# Altium PCB PCB1.PcbDoc (part 2 of 2)
Units mil, origin at the board's own origin, x right, y up, seen from the top; angles counter-clockwise.
Board outline 1771.65 x 629.92 mil, 4 copper layers (L1, L2, L3, L4), stack 61.583 mil thick; 35 components, 23 nets, 151 pads, 78 vias.
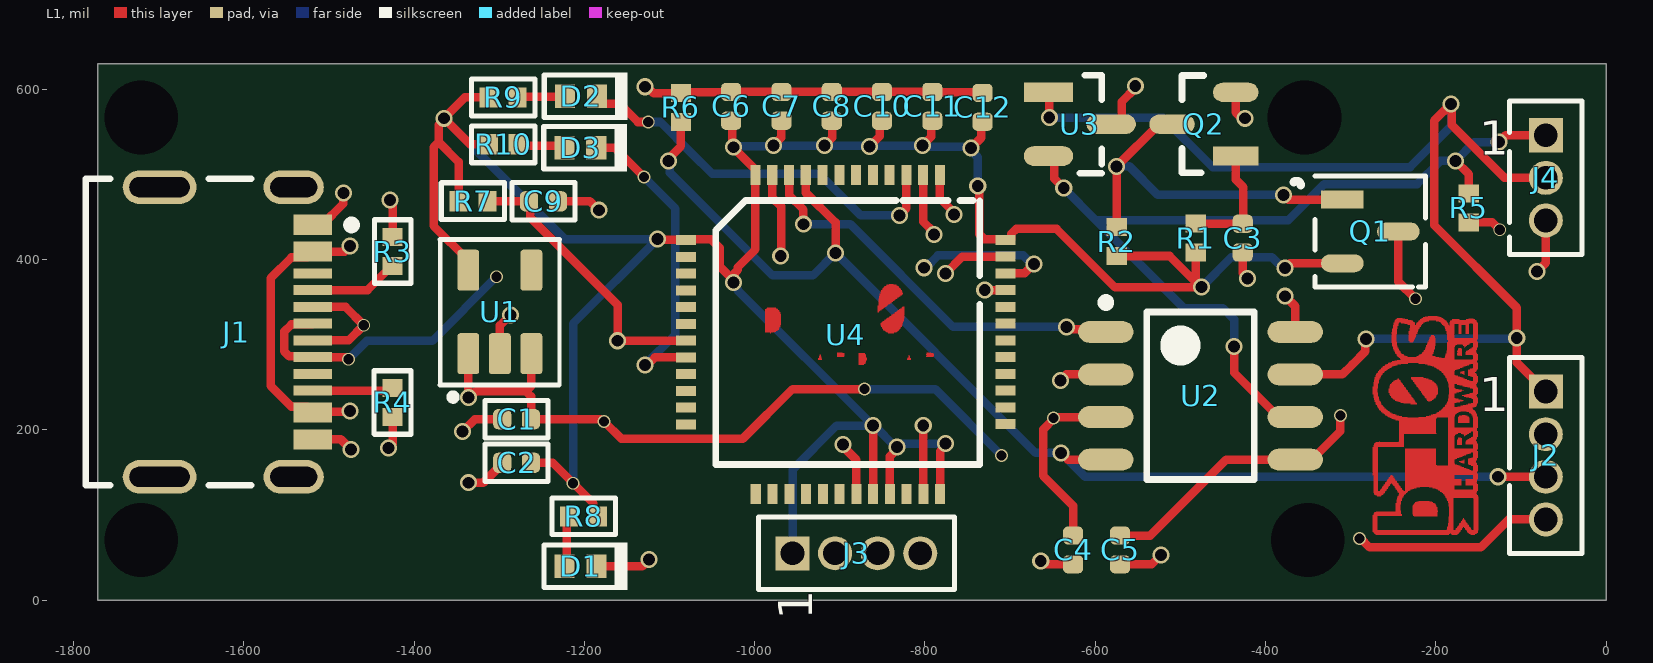
[diagram p0: L1 view]

## Part data (continued)
U4: "Microcontroller", Manufacturer=STMicroelectronics, Supplier Part Number=STM32G431C8T6-ND, Category=Microcontrollers, ComponentLink1Description=https://datasheet.ciiva.com:443/pdfs/VipMasterIC/IC/SGST/SGST-S-A0010030739/SGST-S-A0010102973-1.pdf?src-supplier=IHS+Markit, ComponentLink1URL=https://datasheet.ciiva.com:443/pdfs/VipMasterIC/IC/SGST/SGST-S-A0010030739/SGST-S-A0010102973-1.pdf?src-supplier=IHS+Markit, Manufacturer Part Number=STM32G431C8T6, Pricing="1=5.6, 10=3.797, 25=3.3284, 80=2.876, 230=2.57017, 440=2.48386 (USD)", RoHS=Yes, Stock=1745, Supplier=Digikey

## Free pads (board coordinates)
  round 60 hole 86.61: 13(-1720.47,70.87) 14(-1720.47,566.93) 15(-354.33,566.93) 16(-350.39,70.87)

## Via types
v1: diameter 20, hole 14, L1 to L4, 64 vias
v2: diameter 15, hole 12, L1 to L4, 14 vias

## Nets (pads, with @x,y where several pads share a name; then routed paths per layer and width w, separated by ;. In a path a pad name is that pad's centre, name@x,y a point inside that pad or via, vN(x,y) a via of type N, cw(c..) or ccw(c..) an arc to the next point about the centre after c; other vN are vias at no path point)
3.3V: C2.2 C6.2 C7.2 C8.2 C10.2 C11.2 C12.2 J2.4 J3.1 Q1.2 R1.2 R2.2 R7.2 R8.1 R9.1 R10.1 U1.5 U4.1 U4.20 U4.21 U4.24 U4.36 U4.48 | length 4018
  L1 w10: v1@-1371,558.65 -1371,538 ; R7.2 -1347.72,514.72 -1371,538 ; U1.5 -1336.22,398.82 -1377,439.6 -1377,532 -1371,538 ; R10.1 -1334.43,535.43 v1(-1365,566) -1340.45,590.55 R9.1 ; C2.2 -1262.43,161.25 -1236.97,161.25 -1189.41,113.69 -1189.41,104.06 R8.1 ; v1(-1114,424) -1113.49,423.49 U4.1@-1081.1,423.49 ; U4.1@-1081.1,424 -1051.23,424 -1041.06,413.83 -1041.06,391.76 -1025,375.71 v1(-1025,373) -1023.09,374.91 -1023.09,384.61 -1019.69,388 -1019.69,391.29 -999.01,411.97 -999.01,505.46 -1025,531.45 v1(-1025,532) -1026.28,533.28 -1026.28,561.79 C6.2 ; v1(-978,534) -968.7,543.3 -968.7,562.87 C7.2 ; v1(-918,534) -908.7,543.3 -908.7,562.32 C8.2 ; v1(-865,533) -852.84,545.16 -852.84,560.63 C10.2 ; U4.20 v1@-860.9,204.84 ; U4.21 -841.21,169.08 -833,177.29 v1(-833,180) ; v1(-803,534) -792.81,544.19 -792.81,562.44 C11.2@-792.18,563.07 ; U4.24 -782.16,175.14 -776,181.29 v1(-776,184) ; v1(-746,531) -733.87,543.13 -733.87,561.14 C12.2@-733.12,561.89 ; v1(-738,486.68) -736.09,484.77 -736.09,430.05 -730.23,424.2 U4.36@-705.58,424.2 ; U4.36 -699.68,423.29 -698.77,424.2 -698.77,430.1 -692.87,436 -645.41,436 -576.72,367.31 -475.69,367.31 v1(-475,368) v1@-481.94,374.94 ; R2.2 -512.64,404.25 -483.32,374.94 v1@-481.94,374.94 ; R1.2 v1@-481.94,374.94 ; v1(-377.09,390.09) -371.51,395.67 Q1.2 ; v2(-289.61,72.43) -288.25,72.43 -277.89,62.06 -147.21,62.06 -114.31,94.96 J2.4
  L2 w10: v1(-377.09,390.09) -374.73,390.09 -339,354.36 -339,214.64 -289.61,165.25 v2(-289.61,72.43)
  L4 w10: v1(-1365,566) -1223,424 v1(-1114,424) -1213.19,324.81 v2(-1213.19,137.47) ; v1(-1025,373) -1025,370.29 -1020,365.29 -1020,363.94 v1(-861.05,205) -859.53,205 -834.53,180 v1(-833,180) -830.29,180 -826.29,184 v1(-776,184) ; v1(-1025,532) -1024,533 -979,533 v1(-978,534) v1(-918,534) -917.5,533.5 -865.5,533.5 v1(-865,533) -864.5,533.5 -803.5,533.5 v1(-803,534) -801.5,532.5 -747.5,532.5 v1(-746,531) -746,528.29 -738,520.29 v1(-738,486.68) ; J3.1 -955.51,153.19 -903.7,205 v1@-861.87,205 ; v1(-475,368) -440,403 -392.71,403 -379.8,390.09 v1(-377.09,390.09)
3.3V-CAN: C5.2 Q1.3 U2.5 | length 588.9
  L1 w10: C5.2 -535.37,75.98 -446.2,165.16 U2.5 -345.47,165.16 -312,198.63 v2(-312,217) ; Q1.3 -244.09,374.09 v2(-224,354)
  L2 w10: v2(-312,217) -312,241.5 -224,329.5 v2(-224,354)
5V: C1.2 C4.2 J1.A4B9 J1.B4A9 U1.1 U1.3 U2.3 | length 1609.7
  L1 w10: v1(-1475,222) -1475.76,221.24 -1517.94,221.24 J1.B4A9 -1525.51,227.28 -1544.02,227.28 -1568.34,251.6 -1568.34,378.32 -1544.02,402.64 -1525.51,402.64 J1.A4B9 -1481.55,409.45 v1(-1475,416) ; U1.1 -1336.11,289.46 -1336.11,238.11 v1(-1336,238) -1334.65,238 -1327.24,245.41 -1268.66,245.41 ; U1.3 -1262.2,251.86 -1268.66,245.41 ; v2(-871,248) -955.42,248 -1013.88,189.54 -1156.53,189.54 v2(-1177,210) -1178.35,210 -1180.95,212.6 C1.2 -1262.6,239.35 -1268.66,245.41 ; C4.2 -625.98,110.91 -661,145.93 -661,200.65 -649,212.65 v2(-649,214) -647.84,215.16 U2.3
  L2 w10: v1(-1475,222) -1354.71,222 -1338.71,238 v1(-1336,238) ; v2(-710,170) -666.96,213.04 -655,213.04 -649.96,213.04 v2(-649,214)
  L4 w10: v2(-871,248) -788,248 v2(-710,170)
CAN_RX/BOOT0: J2.3 R6.1 U2.4 U4.45 | length 1426.6
  L1 w10: v1(-1101,516) -1101,518.71 -1094.71,525 -1086.61,533.09 R6.1 ; U4.45 -939.95,478.62 -904.97,443.64 v1(-904.97,407.97) ; v1(-640,173) -632.16,165.16 U2.4 ; v1(-127,145) J2.3
  L4 w10: v1(-1101,516) -1099.59,514.59 -1099.59,502.06 -978.9,381.37 -931.57,381.37 v1(-904.97,407.97) -670,173 v1(-640,173) -612,145 v1(-127,145)
CAN_TX: U2.1 U4.sS | length 472.5
  L1 w10: U4.sS -959.32,499.24 -959.32,475.37 -942.75,458.79 v1(-942.75,441.58) ; v1(-634,321) -631.14,318.14 -590.58,318.14 U2.1
  L4 w10: v1(-942.75,441.58) -887.58,441.58 -767,321 -655,321 v1(-634,321)
CANH: J2.1 J4.2 U2.7 U3.1 | length 1420.2
  L1 w10: U3.1 -654,595.53 v1(-654,567) ; U2.7 -309.84,265.16 -298.06,276.94 -282.68,292.32 -282.68,306.32 v1(-282,307) ; J2.1 -105,279.1 v1(-105,308) -105,343.55 -202,440.55 -202,563 v1(-182,583) -181.36,582.36 -181.36,558 -119.42,496.06 J4.2
  L4 w10: v1(-654,567) -653.5,566.5 -520.1,566.5 -462.22,508.62 -230.38,508.62 -224.52,514.48 -182,557 v1(-182,583) ; v1(-282,307) -165,307 -106,307 v1(-105,308)
CANL: J4.1 R5.1 U2.6 U3.2 | length 1079.9
  L1 w10: U3.2 -654.02,521.65 -648,515.63 -648,495 v1(-637,484) ; v1(-437,298) -437,267.31 -384.84,215.16 U2.6 ; v1(-177,516) -161.42,500.42 R5.1 ; v1(-126,538) -117.94,546.06 J4.1
  L4 w10: v1(-637,484) -599,446 ; v1(-437,298) -437,329.93 -450.07,343 -496,343 -599,446 ; v1(-126,538) -155,538 v1(-177,516) -194.72,516 -222.09,488.62 -331.02,488.62 -373.65,446 -599,446
GND: C1.1 C2.1 C3.1 C4.1 C5.1 C6.1 C7.1 C8.1 C9.1 C10.1 C11.1 C12.1 D1.1 J1.A1B12 J1.B1A12 J1.S1 J1.S2 J1.S3 J1.S4 J3.2 J4.3 Q2.2 R3.2 R4.2 R6.2 U1.2 U2.2 U2.8 U3.3 U4.19 U4.23 U4.35 U4.47 | length 1576.2
  L1 w10: J1.B1A12 -1485.98,188.98 v1(-1474,177) ; J1.A1B12 -1507.87,440.94 -1483,465.82 v1(-1483,478) ; v1(-1430,179) -1425.2,183.8 R4.2 ; v1(-1428,470) -1425.2,467.2 R3.2 ; v1(-1343,198) -1328.4,212.6 C1.1 ; v1(-1336,138) -1318.69,138 -1296.46,160.24 C2.1 ; U1.2@-1299.18,289.6 -1299.18,322.72 v1(-1286.8,335.11) ; C9.1 -1193.5,468.5 v1(-1183,458) ; D1.1 -1132.02,39.98 v1(-1124,48) ; v1(-1129,603) -1126.29,603 -1118.68,595.38 -1086.98,595.38 -1086.02,596.34 -1028.15,596.34 C6.1 C7.1 C8.1 C10.1 C11.1 -790.75,596.34 -732.87,596.34 C12.1 ; U4.47 -979.32,472.74 -969,462.42 -969,404.74 v1(-969.37,404.37) ; v1(-896,183) -896,180.29 -880.58,164.88 U4.19 ; v1(-802,205) -801.84,204.84 U4.23 ; v1(-776,383.86) -756.26,403.61 U4.35 ; v1(-664,46) -660.13,42.13 C4.1 ; v1(-641,258) -633.84,265.16 U2.2 ; U3.3 -574.74,559.06 -568.72,565.07 -568.72,585.57 -553,601.29 v1(-553,604) ; C5.1 -533.87,42.13 v1(-523,53) ; Q2.2 -435.02,572.86 -429.16,567 -425,567 v1(-424,566) ; C3.1 -426.82,383.82 v1(-421,378) ; v1(-377,357) -365.16,345.16 U2.8 ; v1(-81,386) -70.87,396.13 J4.3
NetC3_2: C3.2 Q2.1 R1.1 | length 138.8
  L1 w10: R1.1 -481.9,442.17 -426.86,442.17 C3.2 -426,442.94 -426,485 -435.02,494.02 Q2.1
NetC9_2: C9.2 R7.1 U4.7 | length 335.9
  L1 w10: R7.1 C9.2 -1263.56,467.1 -1263.56,449.56 -1161.03,347.03 v1(-1161.03,304.71) ; v1@-1160.88,304.87 U4.7
NetD1_2: D1.2 R8.2 | length 60.7
  L1 w10: D1.2 -1220.53,42.71 -1220.53,95.69 R8.2
NetD2_2: D2.2 R9.2 | length 56
  L1 w10: R9.2 -1277.66,591.16 -1223.34,591.16 D2.2
NetD3_2: D3.2 R10.2 | length 56.5
  L1 w10: R10.2 -1276.3,533.46 -1225.39,533.46 D3.2
NetJ1_A5: J1.A5 R3.1 | length 105.2
  L1 w7: R3.1@-1426.38,392.44 R3.1
  L1 w10: J1.A5 -1454.65,364.17 R3.1@-1426.38,392.44
NetJ1_B5: J1.B5 R4.1 | length 94.8
  L1 w10: J1.B5 -1428.43,246.06 R4.1
NetJ2_2: J2.2 R5.2 | length 314
  L1 w10: R5.2 -133.62,443.62 v2(-125,435)
  L2 w10: v2(-125,435) -125,433.65 -130,428.65 -130,241.42 -89.28,200.7 -76.61,200.7 J2.2
NetQ1_1: Q1.1 Q2.3 R2.1 | length 437.9
  L1 w10: R2.1 v1(-574.8,509.57) -525.32,559.06 Q2.3 ; v1(-379,476) -373.47,470.47 Q1.1
  L4 w10: v1(-574.8,509.57) -560.17,509.57 -526.6,476 v1(-379,476)
STAT_LED: D2.1 U4.39 | length 465.3
  L1 w10: D2.1 -1185.33,589.79 -1178.52,582.98 -1158.52,582.98 -1137.15,561.61 v2(-1125,561.61) ; v1(-830,452) -821.84,460.16 U4.39
  L4 w10: v2(-1125,561.61) -1110.61,561.61 -1074,525 -1050,501 -924.37,501 -875.37,452 v1(-830,452)
SWCLK: J3.4 U4.38 | length 499
  L1 w10: U4.38 -802.16,444.69 -789.57,432.11 v1(-789.57,429.4)
  L2 w10: J3.4 -755,105.63 -755,106 -755,418.85 -764.57,428.43 -788.6,428.43 v1(-789.57,429.4)
SWDIO: J3.3 U4.37 | length 562.1
  L1 w10: U4.37 -782.47,471.88 -766,455.41 v1(-766,453)
  L2 w10: J3.3 -859.06,58.67 -859.06,81.06 -884,106 -920,142 -920,332.3 -798.3,454 -767,454 v1(-766,453)
USB_DN: J1.A7 J1.B7 U4.33 | length 1075
  L1 w10: J1.A7 -1476.88,305.12 v2(-1459,323) ; J1.B7 -1480.49,344.49 v2(-1459,323) ; v2@-1458.04,323.96 v2(-1459,323) ; v1(-729.76,364.24) U4.33
  L2 w10: v2(-1459,323) -1434.17,323 -1421,336.17 -1397.06,360.11 -1174.2,360.11 -1160.09,346 -937.24,346 -878.35,404.89 -878.35,433.35 -837.7,474 -757.3,474 -729.76,446.46 v1(-729.76,364.24)
USB_DP: J1.A6 J1.B6 U4.34 | length 1294.5
  L1 w10: J1.A6 -1519.61,323.9 -1544.02,323.9 -1552.34,315.58 -1552.34,292.2 -1546.48,286.34 -1519.61,286.34 J1.B6 -1480.79,285.43 -1478.35,283 v2(-1477,283) ; U4.34 -683.08,383.92 v1(-672,395)
  L2 w10: v2@-1303,380.11 -1079.94,380.11 -952.36,507.68 -729.3,507.68 -672,450.38 v1(-672,395)
  L4 w10: v2(-1477,283) -1455.5,304.5 -1378.5,304.5 v2(-1303,380) ; v1(-801.15,390.46) -799.11,390.46 -784.7,404.86 -684.57,404.86 -674.71,395 v1(-672,395)
WORD_LED: D3.1 U4.8 | length 373.8
  L1 w10: D3.1 -1164.5,531.5 v2(-1130,497) ; v1(-1129,276) -1126.29,276 -1117.11,285.18 U4.8
  L4 w10: v2(-1130,497) -1093,460 -1093,312 v1(-1129,276)
pads on no net: J1.A8 J1.B8 U1.4 U4.2 U4.3 U4.4 U4.5 U4.6 U4.9 U4.10 U4.11 U4.12 U4.13 U4.14 U4.15 U4.16 U4.17 U4.18 U4.22 U4.25 U4.26 U4.27 U4.28 U4.29 U4.30 U4.31 U4.32 U4.40 U4.41 U4.42 U4.43 U4.44

## Polygon pours and split planes (outlines as drawn)
GND on L3 (split plane): -20.1,20.1 -1751.56,20.1 -1751.56,609.82 -20.1,609.82

## Other copper
L1:
  region: 545 vertices and 13 holes, not listed, extent -274,77.06 -150.15,333.78
  region: -251.85,238.64 -252.67,238.64 -252.67,240.28 -253.49,240.28 -253.49,241.1 -254.31,241.1 -254.31,243.56 -255.13,243.56 -255.13,248.48 -254.31,248.48 -254.31,251.76 -253.49,251.76 -253.49,253.4 -252.67,253.4 -252.67,254.22 -251.85,254.22 -251.85,255.04 -251.03,255.04 -251.03,255.86 -250.21,255.86 -250.21,256.68 -249.39,256.68 -249.39,257.51 -247.75,257.51 -247.75,258.33 -246.11,258.33 -246.11,259.15 -244.47,259.15 -244.47,259.97 -243.65,259.97 -243.65,259.15 -242.83,259.15 -242.83,258.33 -242.01,258.33 -242.01,256.68 -241.19,256.68 -241.19,255.86 -240.37,255.86 -240.37,255.04 -239.55,255.04 -239.55,253.4 -238.73,253.4 -238.73,252.58 -237.91,252.58 -237.91,250.94 -237.09,250.94 -237.09,250.12 -236.27,250.12 -236.27,249.3 -235.45,249.3 -235.45,247.66 -234.63,247.66 -234.63,246.84 -233.81,246.84 -233.81,246.02 -232.99,246.02 -232.99,244.38 -232.17,244.38 -232.17,243.56 -231.35,243.56 -231.35,241.92 -230.53,241.92 -230.53,241.1 -229.71,241.1 -229.71,240.28 -228.89,240.28 -228.89,238.64 -228.07,238.64 -228.07,237.82 -227.25,237.82 -227.25,237 -226.43,237 -226.43,235.36 -225.61,235.36 -225.61,234.54 -224.79,234.54 -224.79,232.9 -223.97,232.9 -223.97,232.08 -223.15,232.08 -223.15,231.26 -222.33,231.26 -222.33,230.44 -229.71,230.44 -229.71,231.26 -237.91,231.26 -237.91,232.08 -241.19,232.08 -241.19,232.9 -243.65,232.9 -243.65,233.72 -246.11,233.72 -246.11,234.54 -247.75,234.54 -247.75,235.36 -248.57,235.36 -248.57,236.18 -250.21,236.18 -250.21,237 -251.03,237 -251.03,237.82 -251.85,237.82
  region: -168.19,160.72 -168.19,161.54 -170.65,161.54 -170.65,162.36 -172.29,162.36 -172.29,163.18 -169.83,163.18 -169.83,164 -167.37,164 -167.37,164.82 -166.55,164.82 -166.55,160.72 -167.37,160.72
  region: -228.07,259.97 -228.89,259.97 -228.89,261.61 -214.94,261.61 -214.94,260.79 -211.66,260.79 -211.66,259.97 -209.2,259.97 -209.2,259.15 -206.74,259.15 -206.74,258.33 -205.1,258.33 -205.1,257.51 -204.28,257.51 -204.28,256.68 -202.64,256.68 -202.64,255.86 -201.82,255.86 -201.82,255.04 -201,255.04 -201,254.22 -200.18,254.22 -200.18,253.4 -199.36,253.4 -199.36,251.76 -198.54,251.76 -198.54,249.3 -197.72,249.3 -197.72,242.74 -198.54,242.74 -198.54,241.1 -199.36,241.1 -199.36,239.46 -200.18,239.46 -200.18,238.64 -201,238.64 -201,237 -202.64,237 -202.64,236.18 -203.46,236.18 -203.46,235.36 -205.1,235.36 -205.1,234.54 -206.74,234.54 -206.74,233.72 -209.2,233.72 -209.2,234.54 -210.02,234.54 -210.02,235.36 -210.84,235.36 -210.84,237 -211.66,237 -211.66,237.82 -212.48,237.82 -212.48,238.64 -213.3,238.64 -213.3,240.28 -214.12,240.28 -214.12,241.1 -214.94,241.1 -214.94,241.92 -215.76,241.92 -215.76,243.56 -216.58,243.56 -216.58,244.38 -217.4,244.38 -217.4,246.02 -218.22,246.02 -218.22,246.84 -219.04,246.84 -219.04,247.66 -219.86,247.66 -219.86,249.3 -220.68,249.3 -220.68,250.12 -221.51,250.12 -221.51,250.94 -222.33,250.94 -222.33,252.58 -223.15,252.58 -223.15,253.4 -223.97,253.4 -223.97,254.22 -224.79,254.22 -224.79,255.86 -225.61,255.86 -225.61,256.68 -226.43,256.68 -226.43,258.33 -227.25,258.33 -227.25,259.15 -228.07,259.15
  region: -173.93,210.75 -173.93,214.85 -173.11,214.85 -173.11,215.67 -172.29,215.67 -172.29,216.49 -169.01,216.49 -169.01,217.32 -165.73,217.32 -165.73,216.49 -163.27,216.49 -163.27,215.67 -161.63,215.67 -161.63,214.03 -160.81,214.03 -160.81,208.29 -173.93,208.29 -173.93,209.93
  region: -174.75,186.97 -174.75,188.61 -173.93,188.61 -173.93,191.07 -170.65,191.07 -170.65,190.25 -169.83,190.25 -169.83,182.87 -174.75,182.87 -174.75,186.15
  region: -169.01,265.71 -169.01,266.53 -171.47,266.53 -171.47,267.35 -170.65,267.35 -170.65,268.17 -168.19,268.17 -168.19,268.99 -166.55,268.99 -166.55,264.89 -167.37,264.89 -167.37,265.71 -168.19,265.71
  region: -171.47,287.85 -172.29,287.85 -172.29,287.03 -173.11,287.03 -173.11,287.85 -174.75,287.85 -174.75,290.31 -173.93,290.31 -173.93,291.13 -174.75,291.13 -174.75,292.77 -173.93,292.77 -173.93,295.23 -173.11,295.23 -173.11,296.06 -170.65,296.06 -170.65,295.23 -169.83,295.23 -169.83,287.03 -170.65,287.03 -170.65,287.85
  region: -198.54,100.03 -198.54,98.38 -225.61,98.38 -225.61,99.2 -226.43,99.2 -226.43,100.85 -227.25,100.85 -227.25,110.69 -226.43,110.69 -226.43,112.33 -225.61,112.33 -225.61,113.15 -224.79,113.15 -224.79,113.97 -223.97,113.97 -223.97,114.79 -222.33,114.79 -222.33,115.61 -219.86,115.61 -219.86,116.43 -207.56,116.43 -207.56,115.61 -205.1,115.61 -205.1,114.79 -203.46,114.79 -203.46,113.97 -201.82,113.97 -201.82,113.15 -201,113.15 -201,112.33 -200.18,112.33 -200.18,110.69 -199.36,110.69 -199.36,109.05 -198.54,109.05 -198.54,104.95 -197.72,104.95 -197.72,104.13 -198.54,104.13 -198.54,100.85
  region: -985.73,314.55 -987.37,314.55 -987.37,341.62 -986.55,341.62 -986.55,342.44 -984.91,342.44 -984.91,343.26 -975.07,343.26 -975.07,342.44 -973.43,342.44 -973.43,341.62 -972.6,341.62 -972.6,340.8 -971.78,340.8 -971.78,339.98 -970.96,339.98 -970.96,338.34 -970.14,338.34 -970.14,335.88 -969.32,335.88 -969.32,323.57 -970.14,323.57 -970.14,321.11 -970.96,321.11 -970.96,319.47 -971.78,319.47 -971.78,317.83 -972.6,317.83 -972.6,317.01 -973.43,317.01 -973.43,316.19 -975.07,316.19 -975.07,315.37 -976.71,315.37 -976.71,314.55 -980.81,314.55 -980.81,313.73 -981.63,313.73 -981.63,314.55 -984.91,314.55
  region: -797.9,287.48 -797.9,288.3 -798.72,288.3 -798.72,289.12 -797.9,289.12 -797.9,290.76 -795.44,290.76 -795.44,289.94 -794.62,289.94 -794.62,290.76 -792.98,290.76 -792.98,289.94 -790.52,289.94 -790.52,289.12 -789.7,289.12 -789.7,286.66 -790.52,286.66 -790.52,285.84 -798.72,285.84 -798.72,286.66 -797.9,286.66
  region: -820.05,285.02 -819.23,285.02 -819.23,287.48 -818.41,287.48 -818.41,286.66 -817.59,286.66 -817.59,284.2 -816.76,284.2 -816.76,282.56 -820.87,282.56 -820.87,283.38 -820.05,283.38 -820.05,284.2
  region: -898.79,290.76 -897.15,290.76 -897.15,289.94 -894.68,289.94 -894.68,286.66 -895.51,286.66 -895.51,285.84 -902.89,285.84 -902.89,290.76 -899.61,290.76
  region: -875,289.94 -870.9,289.94 -870.9,289.12 -870.08,289.12 -870.08,288.3 -869.26,288.3 -869.26,285.02 -868.44,285.02 -868.44,281.74 -869.26,281.74 -869.26,279.28 -870.08,279.28 -870.08,277.64 -871.72,277.64 -871.72,276.82 -877.46,276.82 -877.46,289.94 -875.82,289.94
  region: -825.79,344.08 -825.79,344.9 -824.15,344.9 -824.15,330.95 -824.97,330.95 -824.97,327.67 -825.79,327.67 -825.79,325.21 -826.61,325.21 -826.61,322.75 -827.43,322.75 -827.43,321.11 -828.25,321.11 -828.25,320.29 -829.07,320.29 -829.07,318.65 -829.89,318.65 -829.89,317.83 -830.71,317.83 -830.71,317.01 -831.53,317.01 -831.53,316.19 -832.35,316.19 -832.35,315.37 -833.99,315.37 -833.99,314.55 -836.45,314.55 -836.45,313.73 -843.01,313.73 -843.01,314.55 -844.65,314.55 -844.65,315.37 -846.29,315.37 -846.29,316.19 -847.11,316.19 -847.11,317.01 -848.75,317.01 -848.75,318.65 -849.57,318.65 -849.57,319.47 -850.39,319.47 -850.39,321.11 -851.21,321.11 -851.21,322.75 -852.03,322.75 -852.03,325.21 -851.21,325.21 -851.21,326.03 -850.39,326.03 -850.39,326.85 -848.75,326.85 -848.75,327.67 -847.93,327.67 -847.93,328.49 -847.11,328.49 -847.11,329.31 -845.47,329.31 -845.47,330.13 -844.65,330.13 -844.65,330.95 -843.83,330.95 -843.83,331.77 -842.19,331.77 -842.19,332.6 -841.37,332.6 -841.37,333.42 -839.73,333.42 -839.73,334.24 -838.91,334.24 -838.91,335.06 -838.09,335.06 -838.09,335.88 -836.45,335.88 -836.45,336.7 -835.63,336.7 -835.63,337.52 -834.81,337.52 -834.81,338.34 -833.17,338.34 -833.17,339.16 -832.35,339.16 -832.35,339.98 -831.53,339.98 -831.53,340.8 -829.89,340.8 -829.89,341.62 -829.07,341.62 -829.07,342.44 -827.43,342.44 -827.43,343.26 -826.61,343.26 -826.61,344.08
  region: -925.03,284.2 -924.21,284.2 -924.21,286.66 -923.39,286.66 -923.39,288.3 -922.57,288.3 -922.57,285.84 -921.75,285.84 -921.75,283.38 -920.93,283.38 -920.93,282.56 -925.03,282.56 -925.03,283.38
  region: -847.11,367.86 -847.11,368.68 -845.47,368.68 -845.47,369.5 -844.65,369.5 -844.65,370.32 -842.19,370.32 -842.19,371.14 -837.27,371.14 -837.27,370.32 -833.99,370.32 -833.99,369.5 -832.35,369.5 -832.35,368.68 -831.53,368.68 -831.53,367.86 -830.71,367.86 -830.71,367.04 -829.89,367.04 -829.89,366.22 -829.07,366.22 -829.07,365.4 -828.25,365.4 -828.25,363.76 -827.43,363.76 -827.43,362.12 -826.61,362.12 -826.61,360.48 -825.79,360.48 -825.79,359.66 -826.61,359.66 -826.61,358.84 -827.43,358.84 -827.43,358.02 -829.07,358.02 -829.07,357.2 -829.89,357.2 -829.89,356.38 -830.71,356.38 -830.71,355.56 -832.35,355.56 -832.35,354.74 -833.17,354.74 -833.17,353.92 -834.81,353.92 -834.81,353.1 -835.63,353.1 -835.63,352.28 -836.45,352.28 -836.45,351.46 -838.09,351.46 -838.09,350.64 -838.91,350.64 -838.91,349.82 -839.73,349.82 -839.73,349 -841.37,349 -841.37,348.18 -842.19,348.18 -842.19,347.36 -843.83,347.36 -843.83,346.54 -844.65,346.54 -844.65,345.72 -845.47,345.72 -845.47,344.9 -847.11,344.9 -847.11,344.08 -847.93,344.08 -847.93,343.26 -848.75,343.26 -848.75,342.44 -850.39,342.44 -850.39,341.62 -851.21,341.62 -851.21,340.8 -852.85,340.8 -852.85,339.98 -853.67,339.98 -853.67,339.16 -854.49,339.16 -854.49,338.34 -855.31,338.34 -855.31,345.72 -854.49,345.72 -854.49,353.92 -853.67,353.92 -853.67,357.2 -852.85,357.2 -852.85,359.66 -852.03,359.66 -852.03,362.12 -851.21,362.12 -851.21,363.76 -850.39,363.76 -850.39,364.58 -849.57,364.58 -849.57,366.22 -848.75,366.22 -848.75,367.04 -847.93,367.04 -847.93,367.86

## Text inside footprints (layer, text, board x,y; h text height)
J2: Top Overlay "1" at -148.87,221.96 h40
J3: Top Overlay "1" at -932.51,-22.88 h40 r90
J4: Top Overlay "1" at -148.87,523.06 h40